# Altium PCB HBridge.PcbDoc (part 4 of 4)
Units mil, origin at the board's own origin, x right, y up, seen from the top; angles counter-clockwise.
Board outline 2900.19 x 4650 mil, 2 copper layers (Top Layer, Bottom Layer), stack 33.512 mil thick; 136 components, 122 nets, 499 pads, 559 vias.
Unrouted connection lines stored in the file: 1.
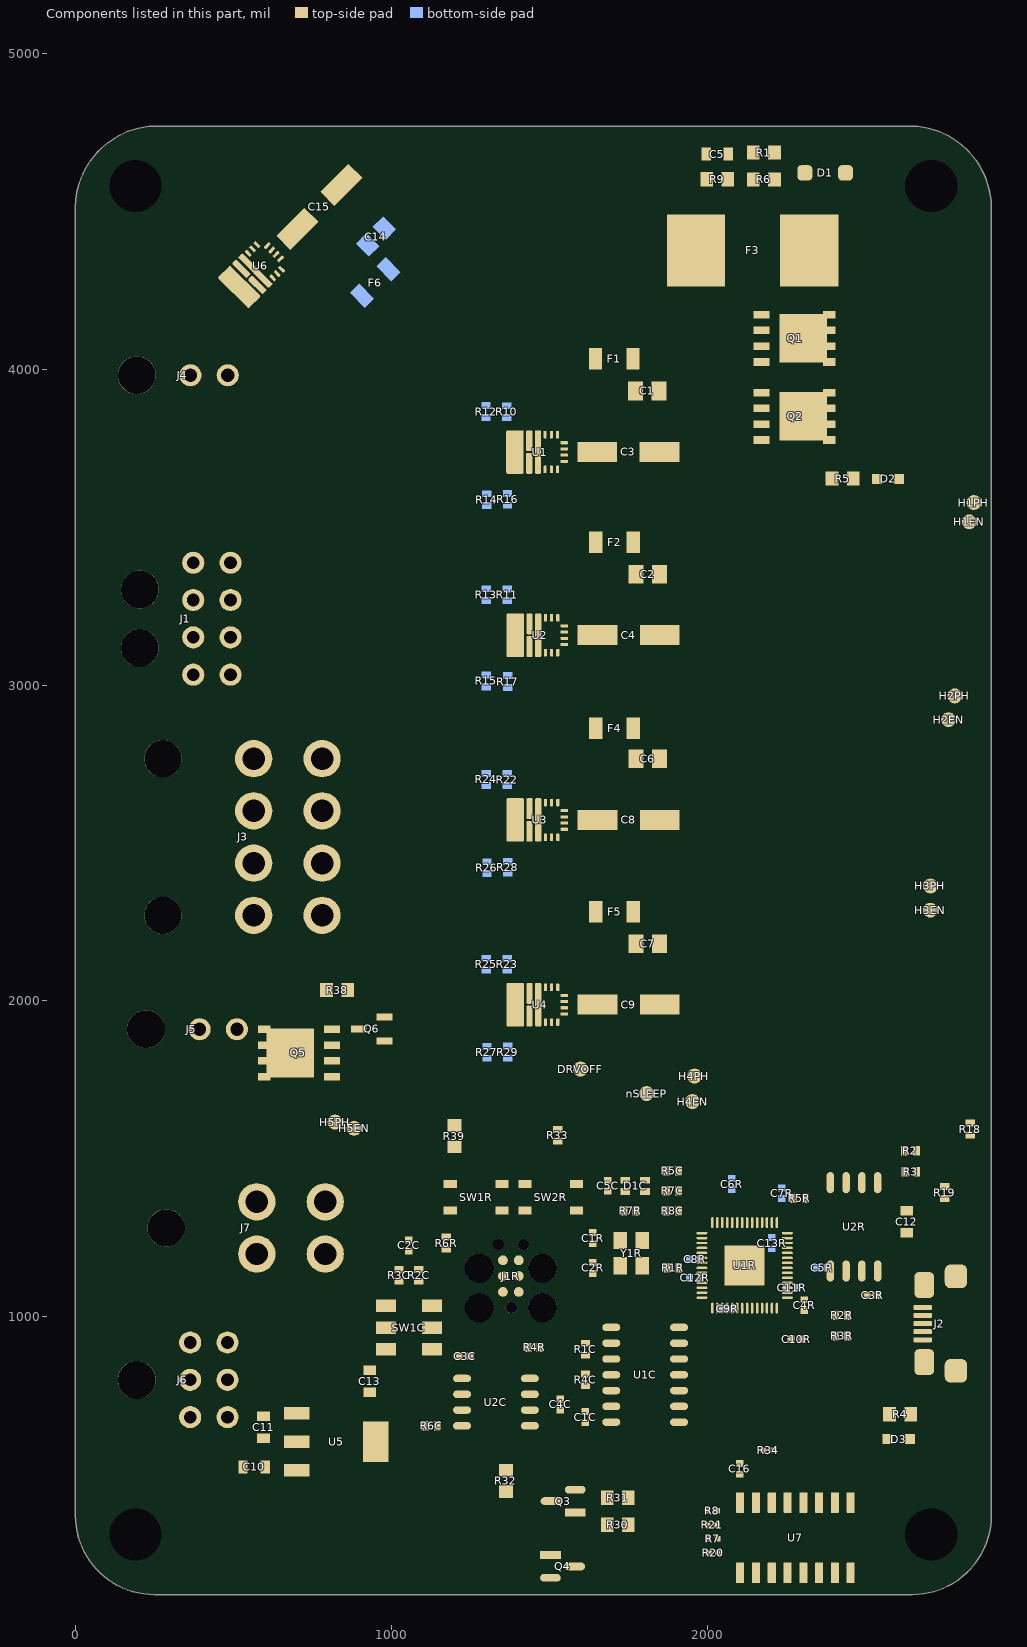
[diagram p3: the components of this part, seen from the top]

## Silkscreen, mask and mechanical layers (free items; w line width, h text height) (continued)
Bottom Overlay:
  drawing of 231 lines, arcs and shapes, not listed
  text "H5_02" at 383.19,3899.99 h15 r90
  text "H5_01" at 484.19,3899.49 h15 r90
  text "+" at 524.5,3466.01 h60
  text "-" at 405.5,3456.01 h60
  text "HBRidge Out" at 532.97,2944 h60 r90
  text "H1_O2" at 179.31,2703.74 h15 r90
  text "H3_O2" at 75.25,2700.99 h15 r90
  text "H1_O1" at 179.25,2603.24 h15 r90
  text "H3_O1" at 78.25,2602.49 h15 r90
  text "H2_O2" at 179.25,2505.99 h15 r90
  text "H4_O2" at 79.25,2504.99 h15 r90
  text "H4_O1" at 78.25,2406.49 h15 r90
  text "H2_O1" at 179.25,2403.49 h15 r90
  text "PUMP+" at 512.44,2052.99 h15 r90
  text "GND" at 411.44,2035.99 h15 r90
  text "5VBUS" at 945.5,1356.99 h15 r90
  text "GND" at 1046.5,1343.99 h15 r90
  text "GND" at 1046.5,1242.99 h15 r90
  text "12V" at 946.5,1240.74 h15 r90
  text "12V" at 712.5,916.74 h15 r90
  text "Vin" at 611.5,914.74 h15 r90
  text "GND" at 612.5,815.99 h15 r90
  text "5V" at 712.5,809.5 h15 r90
  text "CANH" at 712.5,724.49 h15 r90
  text "CANL" at 608.5,717.49 h15 r90